# EAGLE board ADC_DSP (EAGLE 7.1.0)
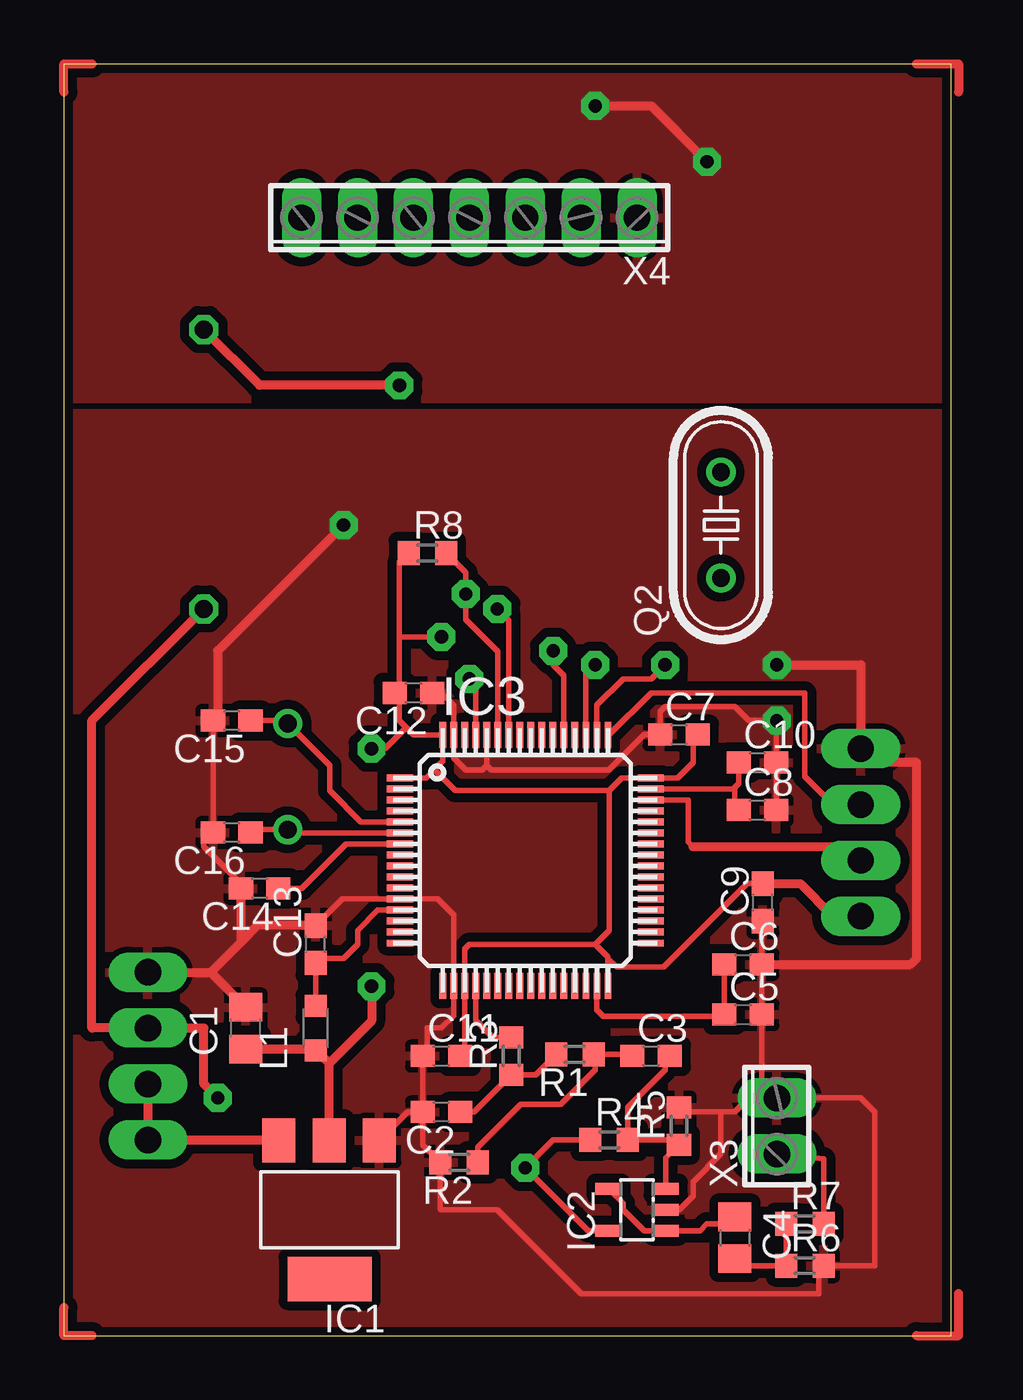
[diagram p0: board, top side]
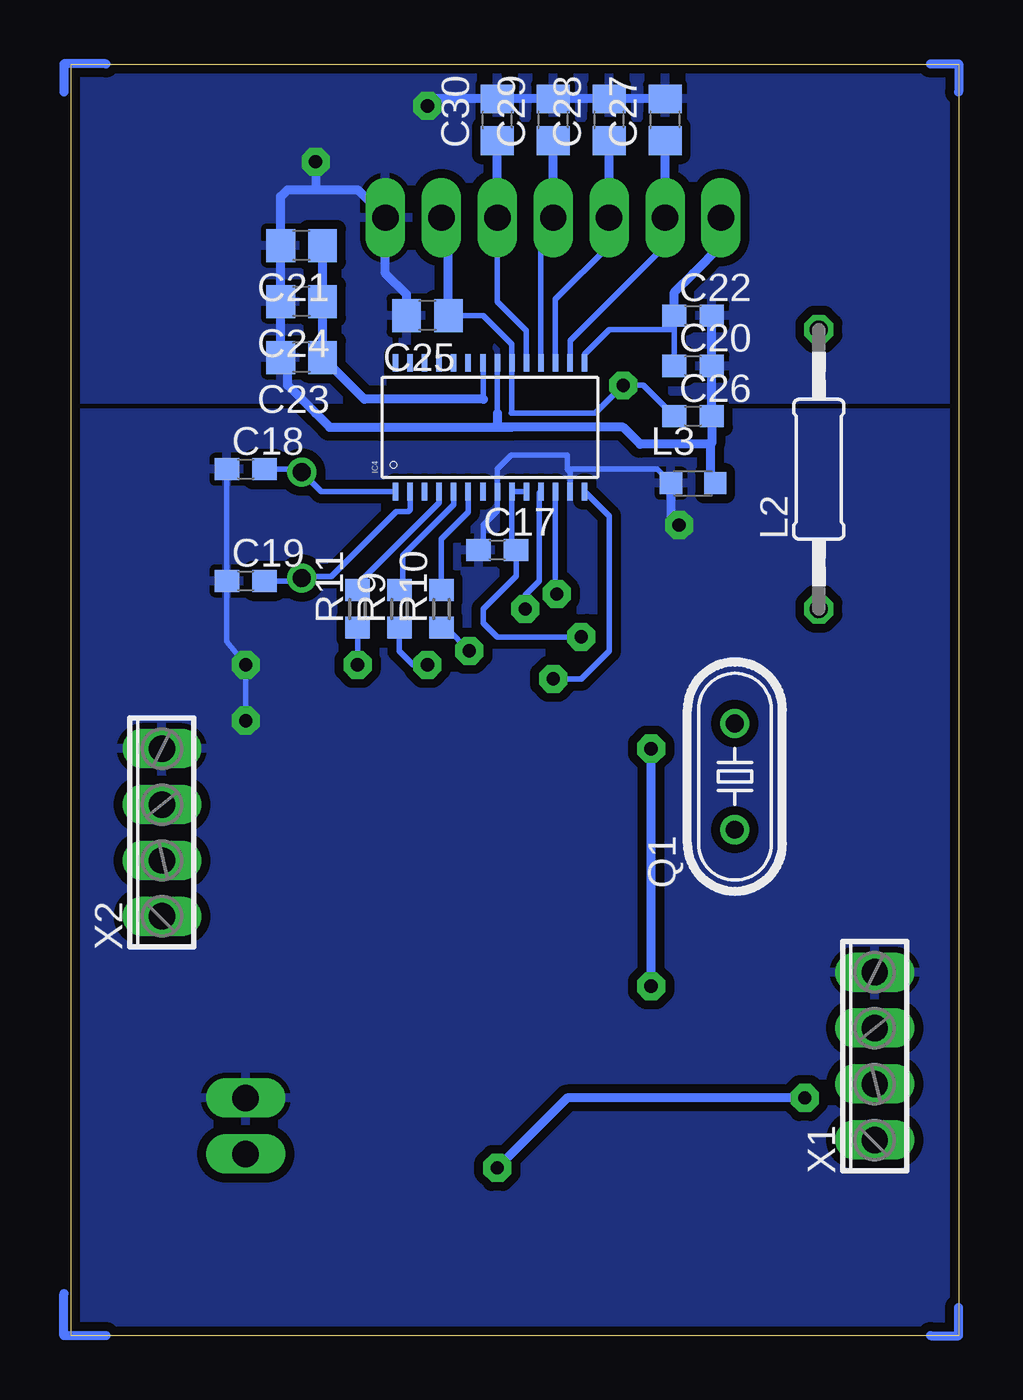
[diagram p1: board, bottom side, seen from below]

Size 40.31 x 57.77 mm. Coordinates in mm from the lower left corner, seen from the top.
Outline: 0,0 40.31,0 40.31,57.77 0,57.77 0,0
Copper layers (1*16): Top 0.035mm / dielectric 1.5mm / Bottom 0.035mm
Design rules "ITEADstudio_DRC": minimum track width 6mil, minimum drill 12mil, track to track 6mil, track to pad 6mil, pad to pad 6mil, via to via 6mil, smd to smd 0mil, copper to edge 10mil, drill to drill 10mil, minimum pad ring 10mil, minimum via ring 6mil, stop-mask expansion 2mil, vias tented up to drill 100mil, thermal gap 10mil

## Footprints (pad centres in the part's own frame; a part is rotated, then mirrored left to right if it is on the bottom)
C0805 = smd 1.3 x 1.5: 1 -0.95,0; 2 0.95,0
C0603 = smd 1.1 x 1: 1 -0.85,0; 2 0.85,0
SOT223 = smd 1.499 x 2.007: 1 -2.261,-3.15; 2 0.025,-3.15; 3 2.311,-3.15 | smd 3.81 x 2.007: 4 0,3.15
SOT23-5 = smd 0.55 x 1.2: 1 -0.95,-1.3; 2 0,-1.3; 3 0.95,-1.3; 4 0.95,1.3; 5 -0.95,1.3
TQFP64 = smd 1.2 x 0.3: 1 -5.7,3.75; 2 -5.7,3.25; 3 -5.7,2.75; 4 -5.7,2.25; 5 -5.7,1.75; 6 -5.7,1.25; 7 -5.7,0.75; 8 -5.7,0.25; 9 -5.7,-0.25; 10 -5.7,-0.75; 11 -5.7,-1.25; 12 -5.7,-1.75; 13 -5.7,-2.25; 14 -5.7,-2.75; 15 -5.7,-3.25; 16 -5.7,-3.75; 33 5.7,-3.75; 34 5.7,-3.25; 35 5.7,-2.75; 36 5.7,-2.25; 37 5.7,-1.75; 38 5.7,-1.25; 39 5.7,-0.75; 40 5.7,-0.25; 41 5.7,0.25; 42 5.7,0.75; 43 5.7,1.25; 44 5.7,1.75; 45 5.7,2.25; 46 5.7,2.75; 47 5.7,3.25; 48 5.7,3.75 | smd 0.3 x 1.2: 17 -3.75,-5.7; 18 -3.25,-5.7; 19 -2.75,-5.7; 20 -2.25,-5.7; 21 -1.75,-5.7; 22 -1.25,-5.7; 23 -0.75,-5.7; 24 -0.25,-5.7; 25 0.25,-5.7; 26 0.75,-5.7; 27 1.25,-5.7; 28 1.75,-5.7; 29 2.25,-5.7; 30 2.75,-5.7; 31 3.25,-5.7; 32 3.75,-5.7; 49 3.75,5.7; 50 3.25,5.7; 51 2.75,5.7; 52 2.25,5.7; 53 1.75,5.7; 54 1.25,5.7; 55 0.75,5.7; 56 0.25,5.7; 57 -0.25,5.7; 58 -0.75,5.7; 59 -1.25,5.7; 60 -1.75,5.7; 61 -2.25,5.7; 62 -2.75,5.7; 63 -3.25,5.7; 64 -3.75,5.7
TSSOP28 = smd 0.8 x 0.25: 1 -2.921,4.623; 2 -2.921,3.962; 3 -2.921,3.302; 4 -2.921,2.642; 5 -2.921,1.981; 6 -2.921,1.321; 7 -2.921,0.66; 8 -2.927,0; 9 -2.921,-0.66; 10 -2.921,-1.321; 11 -2.921,-1.981; 12 -2.921,-2.642; 13 -2.921,-3.302; 14 -2.921,-3.962; 15 2.921,-3.962; 16 2.921,-3.302; 17 2.921,-2.642; 18 2.921,-1.981; 19 2.921,-1.321; 20 2.921,-0.66; 21 2.927,0; 22 2.921,0.66; 23 2.921,1.321; 24 2.921,1.981; 25 2.921,2.642; 26 2.921,3.302; 27 2.921,3.962; 28 2.921,4.623
L2012C = smd 1 x 1: 1 -1,0; 2 1,0
0207/12 = drill 0.813 octagon: 1 -6.35,0; 2 6.35,0
HC49/S = drill 0.813: 1 -2.413,0; 2 2.413,0
R0603 = smd 1 x 1.1: 1 -0.85,0; 2 0.85,0
4POL254 = drill 1.2 long: 1 -3.81,0; 2 -1.27,0; 3 1.27,0; 4 3.81,0
2POL254 = drill 1.2 long: 1 -1.27,0; 2 1.27,0
7POL254 = drill 1.2 long: 1 -7.62,0; 2 -5.08,0; 3 -2.54,0; 4 0,0; 5 2.54,0; 6 5.08,0; 7 7.62,0

## Placement (x,y rotation side)
C1  10u  [C0805]  8.26,13.97 90 top
C2  470  [C0603]  17.14,10.16 180 top
C3  1u  [C0603]  26.67,12.7 0 top
C4  10u  [C0805]  30.48,4.45 270 top
C5  1u  [C0603]  30.84,14.59 0 top
C6  1u  [C0603]  30.84,16.88 0 top
C7  100n  [C0603]  27.94,27.3 0 top
C8  1u  [C0603]  31.5,23.88 0 top
C9  100n  [C0603]  31.75,19.68 90 top
C10  1u  [C0603]  31.5,26.04 0 top
C11  100n  [C0603]  17.14,12.7 0 top
C12  100n  [C0603]  15.88,29.21 180 top
C13  1u  [C0603]  11.43,17.78 90 top
C14  100n  [C0603]  8.89,20.32 180 top
C15  22p  [C0603]  7.62,27.94 180 top
C16  22p  [C0603]  7.62,22.86 180 top
C17  1u  [C0603]  20.95,35.7 0 bottom
C18  22p  [C0603]  32.38,39.37 0 bottom
C19  22p  [C0603]  32.38,34.29 0 bottom
C20  1u  [C0603]  12.06,44.06 0 bottom
C21  10u  [C0805]  29.84,49.53 180 bottom
C22  100n  [C0603]  12.06,46.35 0 bottom
C23  10u  [C0805]  29.84,44.45 180 bottom
C24  47n  [C0805]  29.84,46.99 180 bottom
C25  10u  [C0805]  24.13,46.35 180 bottom
C26  1u  [C0603]  12.06,41.77 0 bottom
C27  [C0805]  13.34,55.24 90 bottom
C28  [C0805]  15.88,55.24 90 bottom
C29  [C0805]  18.41,55.24 90 bottom
C30  [C0805]  20.95,55.24 90 bottom
IC1  REG1117  [SOT223]  12.06,5.71 180 top
IC2  AD8605  [SOT23-5]  26.04,5.71 90 top
IC3  STM32F40XRXT6  [TQFP64]  20.95,21.59 0 top
IC4  CS4272  [TSSOP28]  20.95,41.27 90 bottom
L1  [L2012C]  11.43,13.97 90 top
L2  100u  [0207/12]  6.35,39.37 90 bottom
L3  [L2012C]  12.06,38.73 0 bottom
Q1  8MHz  [HC49/S]  10.16,25.4 90 bottom
Q2  24.576MHz  [HC49/S]  29.84,36.83 90 top
R1  22k  [R0603]  23.2,12.78 180 top
R2  4.7k  [R0603]  17.95,7.87 180 top
R3  33k  [R0603]  20.32,12.7 90 top
R4  47k  [R0603]  24.77,8.89 0 top
R5  47k  [R0603]  27.94,9.53 90 top
R6  1k  [R0603]  33.66,3.17 0 top
R7  10  [R0603]  33.66,5.08 0 top
R8  4.7k  [R0603]  16.51,35.56 0 top
R9  56  [R0603]  25.4,33.02 90 bottom
R10  56  [R0603]  23.5,33.02 90 bottom
R11  56  [R0603]  27.3,33.02 90 bottom
X1  [4POL254]  3.81,12.7 90 bottom
X2  [4POL254]  36.2,22.86 90 bottom
X3  [2POL254]  32.38,9.53 90 top
X4  [7POL254]  18.41,50.8 180 top

## Library data of the parts
C1-C30 L1-L3 R1-R11 = rcl
IC1 = burr-brown; MPN: REG1117; OC_FARNELL: 1097566; OC_NEWARK: 14P6981
IC2 = analog-devices; MF: ALTERA CORPORATION; MPN: AD8603AUJZ-REEL7; OC_FARNELL: 1651290; OC_NEWARK: 59K6904
IC3 = stm32
IC4 = balmer
Q1 Q2 = crystal; OC_FARNELL: 1667008; OC_NEWARK: unknown
X1-X4 = con-phoenix-254; OC_FARNELL: unknown; OC_NEWARK: unknown

## Nets
+3V3: C1.1 C7.2 C9.2 C11.2 C12.2 C17.2 IC1.2 IC3.1 IC3.19 IC3.32 IC3.48 IC3.64 IC4.9 IC4.10 L1.1 R8.1 X2.1
+5V: IC2.5 L2.1 R4.1 X1.3
AGND: C20.2 C21.2 C22.2 C23.2 C24.2 C25.2 C26.2 C27.2 C28.2 C29.2 C30.2 IC4.21 L3.2 X4.1
AVCC: C25.1 C26.1 IC4.20 L2.2 X4.2
DAC_OUT1: IC3.20 R3.2
GND: C1.2 C2.2 C5.2 C6.2 C7.1 C8.2 C9.1 C10.2 C11.1 C12.1 C13.2 C14.2 C15.2 C16.2 C17.1 C18.1 C19.1 IC1.1 IC2.2 IC3.12 IC3.18 IC3.60 IC3.63 IC4.8 IC4.13 L3.1 R2.2 R5.2 R6.2 X1.4 X2.4 X3.2
N$1: C8.1 C10.1 IC3.47
N$2: C5.1 C6.1 IC3.31
N$3: C13.1 IC3.13 L1.2
N$4: C14.1 IC3.7
N$5: C15.1 IC3.5 Q1.2
N$6: C16.1 IC3.6 Q1.1
N$7: C19.2 IC4.2 Q2.1
N$8: C18.2 IC4.1 Q2.2
N$9: IC4.4 R11.2
N$10: IC4.5 R9.2
N$11: IC4.6 R10.2
N$12: C21.1 C23.1 C24.1 IC4.22
N$15: C30.1 IC4.19 X4.3
N$16: C29.1 IC4.18 X4.4
N$17: C28.1 IC4.17 X4.5
N$18: C27.1 IC4.16 X4.6
N$19: C4.1 IC2.1 IC2.4
N$20: C4.2 R6.1 R7.1
N$21: R7.2 X3.1
N$22: C3.2 IC2.3 R4.2 R5.1
N$23: C2.1 R1.2 R3.1
N$24: C3.1 R1.1 R2.1
PA15(SPI3_NSS): IC3.50 R11.1
PB6: IC3.58 IC4.11
PB7: IC3.59 IC4.12 R8.2
PB8: IC3.61 IC4.14
PC10(SPI3_SCK): IC3.51 R9.1
PC12(I2S3_SD): IC3.53 R10.1
SPI2_MISO: IC3.35
SPI2_MOSI: IC3.36
SPI2_NSS: IC3.33
SPI2_SCK: IC3.34
SWDCLK: IC3.49 X2.3
SWDIO: IC3.46 X2.2
V+: IC1.3 X1.1 X1.2
VCOM: C20.1 C22.1 IC4.15 X4.7

## Tracks (layer width: path | path; a pad name or v marks a point on that pad's centre or on a via)
+3V3  (via drill 0.6 pad 1.27)
  Top 0.25: C11.2 18.2,12.91 IC3.19 18.2,17.57 18.41,17.78 24.13,17.78 | IC3.32 24.7,17.14 | 24.7,17.14 24.7,17.2 24.13,17.78 | 24.77,24.77 25.34,25.34 IC3.48 27.88,25.34 28.57,26.04 28.57,27.09 C7.2 | 24.77,24.77 24.77,18.41 24.13,17.78 | 15.56,27.62 15.89,27.29 IC3.64 17.2,26.09 17.14,26.04 16.83,25.72 | 15.56,27.62 15.24,27.94 15.24,29 C12.2 | IC3.1 16.45,25.34 16.83,25.72 | 24.77,24.77 17.78,24.77 16.83,25.72 | 15.24,29.43 C12.2 | v17.14,31.75 15.24,31.75 | 15.24,31.75 15.24,29.43 | 15.24,29.43 C12.2 | 15.24,31.75 15.24,35.14 R8.1 | v13.97,26.67 14.61,26.67 15.56,27.62 | C9.2 31.04,20.54 27.75,17.25 27.25,16.75 25.1,16.75 24.7,17.14
  Top 0.406: C1.1 11.38,13.02 L1.1 12.04,12.36 | IC1.2 12.04,12.36 | v13.97,15.88 13.97,14.29 12.04,12.36 | C9.2 33.44,20.54 34.92,19.05 X2.1
  Bottom 0.25: IC4.10 IC4.9 20.3,35.88 C17.2 20.11,34.51 21.59,33.02 21.59,32.38 20.95,31.75 v17.14,31.75
  Bottom 0.406: v13.97,15.88 v13.97,26.67
+5V  (via drill 0.6 pad 1.27)
  Top 0.25: R4.1 22.23,8.89 v20.95,7.62 23.81,4.76 IC2.5
  Top 0.406: v6.99,10.79 6.35,11.43 6.35,13.97 X1.3 1.27,13.97 1.27,27.94 L2.1
  Bottom 0.406: v6.99,10.79 17.78,10.79 v20.95,7.62
AGND  (via drill 0.6 pad 1.27)
  Top 0.406: v24.13,55.88 26.67,55.88 v29.21,53.34
  Bottom 0.25: L3.2 11.21,38.88 | 10.79,46.35 C22.2 | IC4.21 20.95,41.91
  Bottom 0.406: 11.21,38.88 11.25,38.92 11.25,40.5 | 11.25,40.5 14.46,40.5 15.24,41.27 20.32,41.27 | 20.32,41.27 20.95,41.27 20.95,41.91 | 11.25,40.5 11.21,40.53 C26.2 C20.2 C22.2 | 29.21,52.07 30.48,52.07 30.8,51.76 C21.2 C24.2 C23.2 30.48,44.13 30.48,43.18 29.21,41.91 28.57,41.27 20.32,41.27 | 29.21,52.07 27.3,52.07 X4.1 26.04,48.26 25.08,47.3 C25.2 | C27.2 C28.2 C29.2 C30.2 23.82,56.2 v24.13,55.88 | v29.21,53.34 29.21,52.07
  pour Bottom (isolate 0.406): 0,57.78 40.64,57.78 40.64,42.55 0,42.55
  pour Top (isolate 0.406): 0,57.78 40.64,57.78 40.64,42.55 0,42.55
AVCC  (via drill 0.6 pad 1.27)
  Top 0.406: v15.24,43.18 8.89,43.18 L2.2
  Bottom 0.25: C26.1 14.32,43.18 v15.24,43.18 16.51,41.91 20.32,41.91 20.3,41.94 IC4.20 20.3,45.06 21.59,46.35 C25.1
  Bottom 0.406: C25.1 23.18,50.48 X4.2
DAC_OUT1
  Top 0.25: IC3.20 18.7,14.31 19.05,13.97 19.47,13.55 R3.2
GND  (via drill 0.6 pad 1.27)
  Top 0.25: C12.1 17.14,29.21 17.7,28.65 IC3.63 17.7,26.25 18.25,25.7 19,25.7 19.2,25.9 | IC3.60 19.2,25.9 | C15.2 C16.2 6.35,22.44 6.35,22.23 8.04,20.54 C14.2 | 19.2,25.9 19.41,25.7 24.75,25.7 26.36,27.3 C7.1 27.09,28.36 27.3,28.57 30.48,28.57 31.11,27.94 v32.38,27.94 32.35,27.91 C10.2 C8.2 | C2.2 C11.1 16.51,12.91 16.51,13.97 17.14,13.97 17.7,14.53 IC3.18 17.7,19.12 17.14,19.68 16.99,19.84 IC3.12 12.64,19.84 C13.2 | IC2.2 27.94,5.71 28.57,6.35 28.57,6.99 29.84,8.26 29.84,10.16 | 29.84,10.16 28.16,10.16 R5.2 | IC1.1 15.62,10.16 C2.2 | C9.1 31.7,18.78 C6.2 C5.2 31.7,11.48 31.75,11.43 | C2.2 16.3,8.68 R2.2 17.1,5.76 17.14,5.71 18.41,5.71 19.68,5.71 23.5,1.91 34.29,1.91 34.29,2.96 R6.2 36.83,3.17 36.83,10.16 36.2,10.79 X3.2 31.75,11.43 | 29.84,10.16 30.48,10.16 31.75,11.43
  Top 0.406: X1.4 6.67,16.51 | 6.67,16.51 C1.2 | C13.2 8.79,18.63 8.1,17.94 | 8.1,17.94 6.67,16.51 | C14.2 8.04,18 8.1,17.94 | v12.7,36.83 6.99,31.11 6.99,28.16 C15.2 | C6.2 38.47,16.88 38.73,17.14 38.73,26.04 36.83,26.04 X2.4 36.2,30.48 v32.38,30.48
  Bottom 0.25: C18.1 C19.1 33.23,31.54 v32.38,30.48 v32.38,27.94 | C17.1 21.59,35.91 21.59,36.83 20.95,37.47 IC4.8 20.95,39.37 20.32,40.01 17.78,40.01 17.78,39.37 | 17.78,39.37 13.7,39.37 L3.1 | IC4.13 17.65,39.24 17.78,39.37
  Bottom 0.406: L3.1 13.06,37.2 v12.7,36.83
  pour Top (isolate 0.406): 0,41.91 40.64,41.91 40.64,0 0,0
  pour Bottom (isolate 0.406): 0,41.91 40.64,41.91 40.64,0 0,0
N$1
  Top 0.25: IC3.47 30.41,24.84 | 30.41,24.84 30.48,24.77 30.48,24.05 C8.1 | C10.1 30.65,25.09 30.41,24.84
N$2
  Top 0.25: IC3.31 24.2,14.79 24.5,14.5 29.91,14.5 C5.1 C6.1
N$3
  Top 0.25: IC3.13 14.26,19.34 13.34,18.41 13.34,17.78 12.7,17.14 11.64,17.14 C13.1 L1.2
N$4
  Top 0.25: IC3.7 12.81,22.34 10.79,20.32 C14.1
N$5
  Top 0.25: IC3.5 13.49,23.34 12.06,24.77 12.06,25.91 Q1.2 10.03,27.94 C15.1
N$6
  Top 0.25: IC3.6 10.31,22.84 Q1.1 8.6,22.99 C16.1
N$7
  Bottom 0.25: C19.2 29.97,34.29 Q2.1 29.76,34.5 28.5,34.5 25.55,37.45 25,37.45 24.92,37.54 IC4.2
N$8
  Bottom 0.25: IC4.1 28.96,38.35 Q2.2 29.97,39.37 C18.2
N$9
  Bottom 0.25: IC4.4 23.6,37.86 24.5,36.95 26.75,34.7 27.3,34.15 R11.2
N$10
  Bottom 0.25: IC4.5 22.94,37.77 25.25,35.45 25.25,34.02 R9.2
N$11
  Bottom 0.25: IC4.6 22.28,37.41 23.5,36.2 R10.2
N$12
  Bottom 0.25: IC4.22 21.59,44.17 21.59,42.55
  Bottom 0.406: 21.59,42.55 26.99,42.55 C23.1 C24.1 C21.1
N$13
  Top 0.406: 0,56.52 0,57.78 1.27,57.78
N$14
  Top 0.406: 38.73,57.78 40.64,57.78 40.64,56.52
N$15
  Bottom 0.25: IC4.19 19.63,45.67 20.95,46.99 X4.3
  Bottom 0.406: X4.3 C30.1
N$16
  Bottom 0.25: IC4.18 18.97,50.24 X4.4
  Bottom 0.406: X4.4 C29.1
N$17
  Bottom 0.25: IC4.17 18.31,47.09 15.88,49.53 X4.5
  Bottom 0.406: X4.5 C28.1
N$18
  Bottom 0.25: IC4.16 17.65,45.21 14.61,48.26 13.34,49.53 X4.6
  Bottom 0.406: X4.6 C27.1
N$19
  Top 0.25: IC2.4 25.4,6 25.4,5.71 26.35,4.76 IC2.1 28.89,4.76 29.21,5.08 30.16,5.08 C4.1
N$20
  Top 0.25: R7.1 R6.1 30.8,3.17 C4.2
N$21
  Top 0.25: R7.2 34.51,8.04 X3.1
N$22
  Top 0.25: 27.43,6.57 IC2.3 27.34,8.07 R5.1 27.73,8.89 R4.2 25.61,10.38 26.67,11.43 27.3,12.06 27.3,12.48 C3.2
N$23
  Top 0.25: C2.1 18.63,10.16 R3.1 21.43,11.85 R1.2
N$24
  Top 0.25: C3.1 25.75,12.78 R1.1 24.13,12.7 24.13,12.06 22.57,10.5 20.75,10.5 18.8,8.55 R2.1
N$25
  Top 0.406: 1.27,0 0,0 0,1.27
N$26
  Top 0.406: 38.73,0 40.64,0 40.64,1.91
N$27
  Bottom 0.406: 1.27,0 0,0 0,1.27
N$28
  Bottom 0.406: 38.73,0 40.64,0 40.64,1.91
N$29
  Bottom 0.406: 38.73,57.78 40.64,57.78 40.64,56.52
N$30
  Bottom 0.406: 1.27,57.78 0,57.78 0,56.52
PA15(SPI3_NSS)  (via drill 0.6 pad 1.27)
  Top 0.25: IC3.50 24.2,28.65 25.4,29.84 26.67,29.84 v27.3,30.48
  Bottom 0.25: v27.3,30.48 R11.1
PB6  (via drill 0.6 pad 1.27)
  Top 0.25: IC3.58 20.2,32.5 v19.68,33.02
  Bottom 0.25: v19.68,33.02 19.68,33.66 19.05,34.29 19.05,38.28 IC4.11
PB7  (via drill 0.6 pad 1.27)
  Top 0.25: IC3.59 19.7,31.09 18.25,32.55 v18.25,33.7 18.25,34.66 R8.2
  Bottom 0.25: IC4.12 18.31,33.76 v18.25,33.7
PB8  (via drill 0.6 pad 1.27)
  Top 0.25: IC3.61 18.7,29.55 v18.41,29.84
  Bottom 0.25: v18.41,29.84 17.14,29.84 15.88,31.11 15.88,37.24 IC4.14
PC10(SPI3_SCK)  (via drill 0.6 pad 1.27)
  Top 0.25: IC3.51 23.7,30.05 v24.13,30.48
  Bottom 0.25: v24.13,30.48 24.77,30.48 25.4,31.11 R9.1
PC12(I2S3_SD)  (via drill 0.6 pad 1.27)
  Top 0.25: v22.23,31.11 22.23,30.48 22.7,30 IC3.53
  Bottom 0.25: R10.1 23.28,32.17 v22.23,31.11
SWDCLK
  Top 0.25: IC3.49 24.75,27.29 26.67,29.21 33.66,29.21 33.66,25.4 34.92,24.13 X2.3
SWDIO
  Top 0.25: IC3.46 28.36,24.34 28.36,22.43 28.57,22.23
  Top 0.406: 28.57,22.23 35.56,22.23 X2.2
V+
  Top 0.25: IC1.3 9.73,8.89
  Top 0.406: X1.2 X1.1 9.73,8.89 IC1.3
VCOM
  Bottom 0.25: C20.1 12.91,45.72 | 12.91,45.72 C22.1 | IC4.15 16.99,44.6 15.88,45.72 12.91,45.72
  Bottom 0.406: C22.1 12.91,47.41 12.06,48.26 10.79,49.53 X4.7